# Altium PCB h743PCB.PcbDoc (part 2 of 3)
Units mil, origin at the board's own origin, x right, y up, seen from the top; angles counter-clockwise.
Board outline 2560 x 1770 mil, 4 copper layers (Top Layer, Signal, some, Bottom Layer), stack 63.712 mil thick; 101 components, 163 nets, 684 pads, 394 vias.
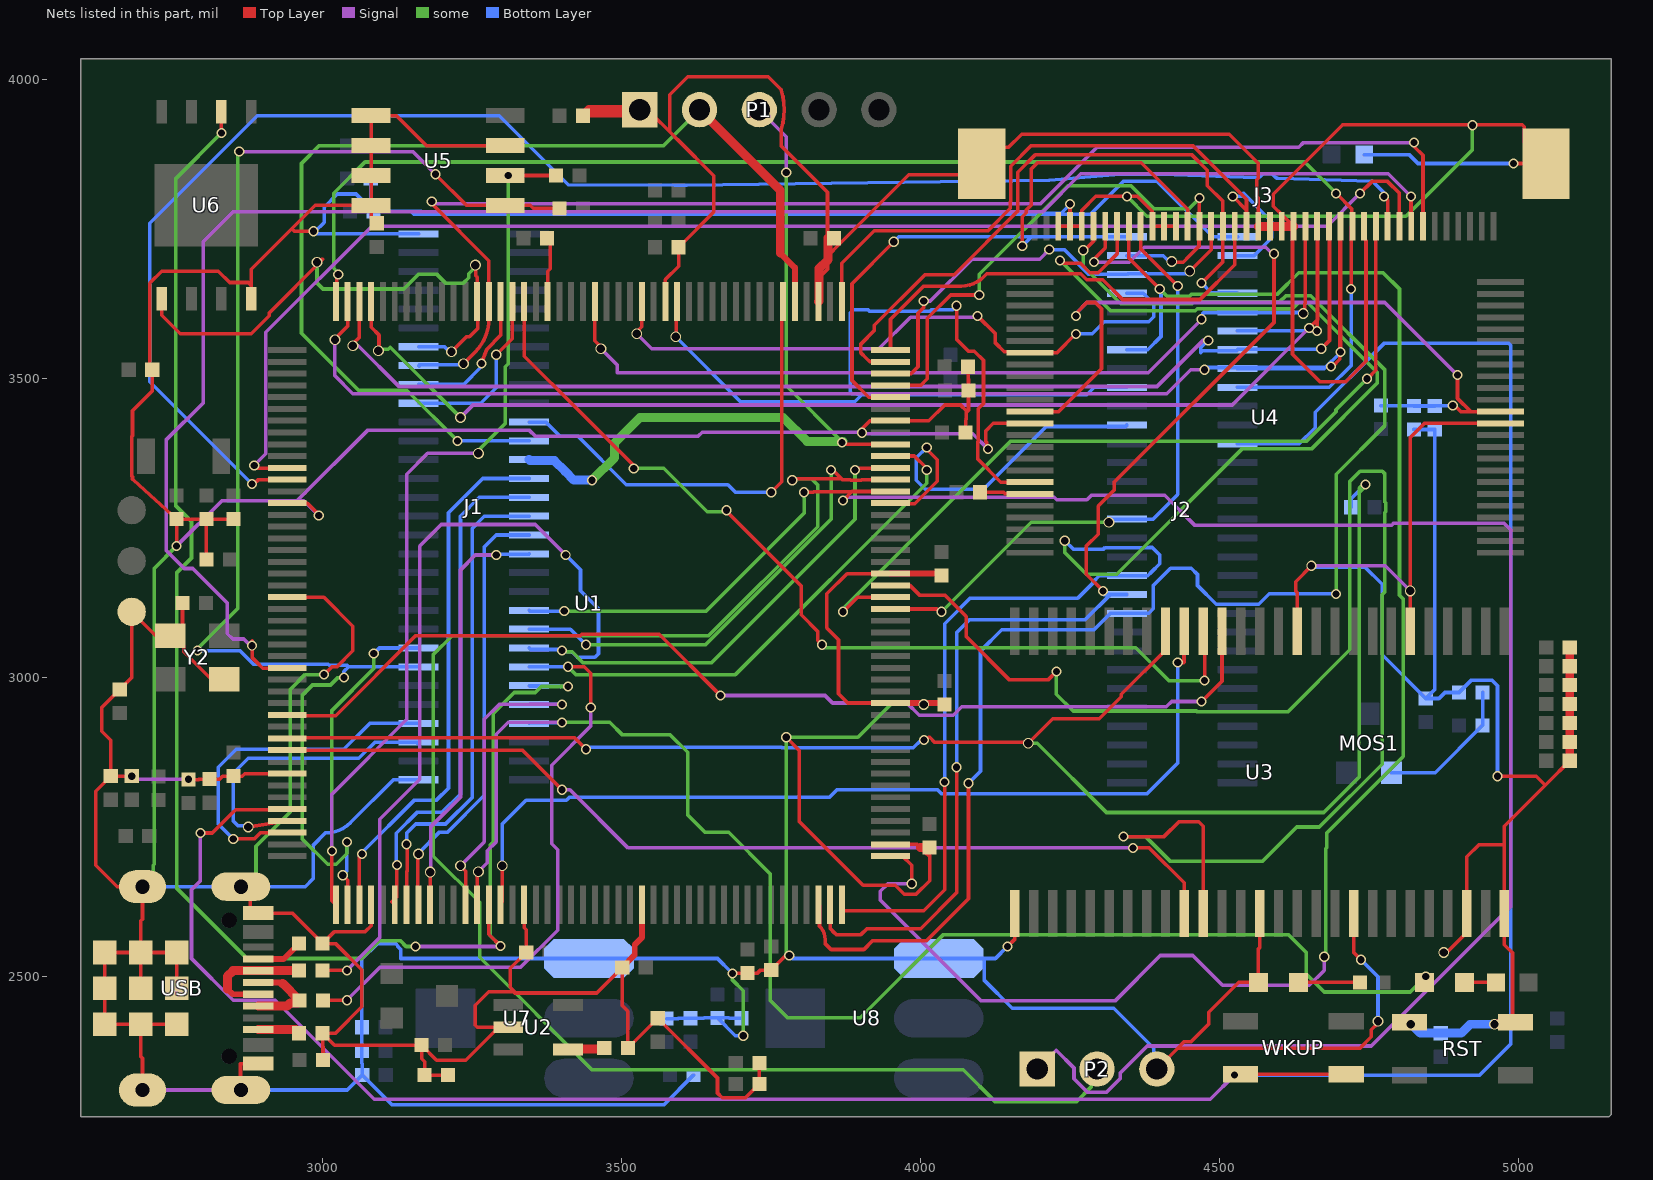
[diagram p4: the nets of this part, all layers, seen from the top]

## Via types
v1: diameter 17, hole 12, Top Layer to Bottom Layer, 305 vias
v2: diameter 18, hole 14, Top Layer to Bottom Layer, 72 vias
v3: diameter 17/16/16/16 (per signal layer), hole 12, Top Layer to Bottom Layer, 17 vias

## Nets (pads, with @x,y where several pads share a name; then routed paths per layer and width w, separated by ;. In a path a pad name is that pad's centre, name@x,y a point inside that pad or via, vN(x,y) a via of type N, cw(c..) or ccw(c..) an arc to the next point about the centre after c; other vN are vias at no path point) (continued)
FMC_NWAIT: J2.27 U1.150 U4.7 | length 1093.4
  Top Layer w6: v2(3525,3575) 3525,3578.25 3533.43,3586.67 U1.150@3533.43,3629.09 ; v1(4095,3605) 4125,3575 4125,3559.75 4139.75,3545 4181.02,3545 U4.7@4182.6,3543.42 4228,3543.42 v1(4259.58,3575)
  Signal w6: v2(3525,3575) 3550,3550 3930,3550 3983,3603 4093,3603 v1(4095,3605)
  Bottom Layer w6: v1(4259.58,3575) 4287,3575 4307,3595 4381.49,3595 4390,3603.51 4390,3625 4385,3630 4385,3630.51 J2.27@4372.56,3642.95 ; J2.27@4345,3642.95 J2.27@4372.56,3642.95 ; J2.27@4375.46,3640.05 J2.27@4372.56,3642.95
FMC_NWE: J2.22 U1.147 U4.18 | length 1595.9
  Top Layer w6: v2(3590,3570) 3591.24,3571.24 3591.24,3627.85 U1.147@3592.48,3629.09 ; v1(4060,3622) 4060,3566 4080,3546 4089.72,3546 4105,3530.72 4105,3458.03 4096.5,3449.53 4096.5,3395.15 4095.13,3393.78 4095.13,3365.83 4134.06,3326.89 U4.18@4182.6,3326.89
  Bottom Layer w6: v2(3590,3570) 3697.24,3462.76 3699,3461 3884.23,3461 cw(c3901.56,3386.89) 3890.31,3462.16 3901.14,3473 ; v1(4060,3622) 4053,3615 4017.57,3615 4015.07,3612.5 3914.5,3612.5 3912,3615 3887,3615 3882,3610 3882,3478 3885.24,3474.76 3885.52,3474.49 3901.14,3473 ; J2.22@4345,3485.47 4290.47,3485.47 4278,3473 3901.14,3473
FMC_SDCKE0: U1.35 U3.37 | length 1644.2
  Top Layer w6: U1.35@2940.3,2878.48 3333.8,2878.48 v1(3400,2812.29) ; v1(4355,2715) 4382.55,2715 4441.06,2656.49 U3.37@4441.06,2605
  Signal w6: v1(3400,2812.29) 3413.13,2812.29 3510.42,2715 v1(4355,2715)
FMC_SDCLK: U1.112 U3.38 | length 2601.3
  Top Layer w6: U1.112@3949.39,3154.08 3981.92,3154.08 3998,3138 4040,3138 4076,3102 4076,3068.54 4148.54,2996 4213,2996 v1(4227,3010) ; v1(4339,2734) 4407,2734 4432,2759 4465,2759 4472.56,2751.44 U3.38@4472.56,2605
  some w6: v1(4227,3010) 4227,2972 4255,2944 4461.25,2944 4462.75,2942.5 4614.22,2942.5 4718,3046.28 4718,3328 4735,3345 4772.49,3345 4776,3341.49 4776,3294.46 4778,3292.46 4778,3277.54 4776,3275.54 4776,3142.88 4772.02,3138.9 4772.02,2855.05 4666.97,2750 4629,2750 4572,2693 4417,2693 4376,2734 v1(4339,2734)
FMC_SDNCAS: U1.160 U3.17 | length 1581
  Top Layer w6: U1.160@3336.58,3629.09 3336.58,3537.71 3426.79,3447.5 3427.25,3447.5 3520,3354.75 v1(3520,3350) ; v1(3675,3280) 3675,3278.28 3800,3153.28 3800,3105 3827.9,3077.1 3827.9,3062.1 v1(3835,3055) ; U3.17@4472.56,3077.44 4475,3075 v1(4475,2995)
  some w6: v1(3520,3350) 3570.25,3350 3642.75,3277.5 3672.5,3277.5 v1(3675,3280) ; v1(3835,3055) 3840,3050 4360,3050 4415,2995 v1(4475,2995)
FMC_SDNE0: R19.2 U1.34 U3.19 | length 2776.2
  Top Layer w6: U1.34@2940.3,2898.17 2941.21,2899.09 3420.91,2899.09 v1(3440,2880) ; v1(4005.75,2895.5) 4008.73,2895.5 4013.12,2899.89 4015.11,2899.89 4023.5,2891.5 4178.5,2891.5 v2(4180,2890) 4221,2931 4298.63,2931 4335.66,2968.03 4335.66,2972.04 4409.57,3045.94 U3.19@4409.57,3077.44
  some w6: v2(4180,2890) 4195,2890 4310.82,2774.18 4674.18,2774.18 4734,2834 4734,3317 4740,3323 v1(4744,3323) 4744,3320.02 4734,3310.02
  Bottom Layer w6: v1(3440,2880) 3443.09,2883.09 3767.17,2883.09 3767.75,2882.5 3987.5,2882.5 4000.64,2895.64 4005.61,2895.64 v1(4005.75,2895.5) ; R19.2@4720,3285 4720,3299 v1(4744,3323)
FMC_SDNRAS: U1.59 U3.18 | length 1545.6
  Top Layer w6: U1.59@3297.21,2620 3296.1,2621.1 3300,2625 v2(3300,2685) ; v1(4430,3025) 4440.11,3025 4440.53,3025.42 4440.53,3076.91 U3.18@4441.06,3077.44
  Bottom Layer w6: v2(3300,2685) 3300,2755 3339.79,2794.79 3407.25,2794.79 3412.46,2800 3847.35,2800 3859.35,2812 4028.25,2812 4034.67,2805.58 4378.63,2805.58 4430,2856.96 v1(4430,3025)
FMC_SDNWE: U1.32 U3.16 | length 1783.9
  Top Layer w6: U1.32@2940.3,2937.54 2941.57,2936.27 3021.27,2936.27 3154.74,3069.74 3429.99,3069.74 3432.75,3072.5 3562.5,3072.5 v1(3665,2970) ; v1(4470,2960) 4504.05,2994.05 U3.16@4504.05,3077.44
  Signal w6: v1(3665,2970) 3840,2970 3852.5,2957.5 3977.04,2957.5 3997.54,2937 4054.57,2937 4068.57,2951 4410.75,2951 4419.75,2960 v1(4470,2960)
GND: C1.1 C2.1 C3.1 C4.1 C5.2 C6.2 C7.2 C8.1 C9.1 C10.1 C11.1 C12.2 C13.2 C14.2 C15.2 C16.2 C17.2 C18.2 C19.2 C20.2 C21.2 C22.2 C23.2 C24.2 C25.2 C26.2 C27.2 C28.1 C29.1 C30.1 C31.1 C32.1 C33.1 C35.1 C36.1 C37.1 C38.1 C39.1 C40.1 C41.1 C42.1 C43.1 C44.2 C45.2 C60.2 C61.2 C62.2 C63.2 C64.2 C65.2 C66.2 C68.2 C?34.2 GND.1 J1.1 J1.30 J2.31 J3.3 J3.4 J3.5 J3.11 J3.12 J3.13 J3.20 J3.21 J3.22 J3.23 J3.29 J3.A J3.B P1.1 P2.3 PWR.2 R1.1 R1.2 R4.2 R7.2 R14.1 R22.1 R23.1 RST.2 U1.14 U1.22 U1.37 U1.48 U1.61 U1.71 U1.90 U1.102 U1.113 U1.126 U1.135 U1.148 U1.158 U2.2 U3.6 U3.12 U3.28 U3.41 U3.46 U3.52 U3.54 U4.13 U4.36 U5.1 U5.2 U5.3 U5.4 U5.7 U6.4 U7.1 U8.1 USB.1 USB.12 USB.SH1 USB.SH2 USB.SH3 USB.SH4 Y2.2 Y2.4 | length 26524.6
  Top Layer w6: v3(2680,2835) C4.1@2645,2835 ; USB.SH2@2695,2480 USB.SH2@2695,2540 ; USB.SH4@2698.05,2309.92 2698.05,2363 2695,2366.05 USB.SH2@2695,2420 ; USB.SH2@2755,2420 USB.SH2@2695,2420 ; USB.SH2@2755,2480 USB.SH2@2755,2540 USB.SH2@2695,2540 ; v1(2755,3220) C8.1@2755,3265 ; C11.1@2765,3125 2765,3087.67 Y2.4@2747.33,3070 ; C7.2@2775,2829.37 2792,2829.37 2792.63,2830 C6.2@2810,2830 2827,2830 2832,2835 C13.2@2850,2835 2865,2835 2869.11,2839.11 U1.37@2940.3,2839.11 ; C26.2@2804.95,3197.52 2804.95,3231 2805,3231.05 C9.1@2805,3265 ; Y2.2@2835,2997.17 2813.09,2997.17 2766.95,3043.3 2766.95,3052.33 2749.28,3070 Y2.4@2747.33,3070 ; C18.2@2850,3265 C9.1@2805,3265 ; USB.SH3@2862.62,2309.92 2862,2309.92 2862,2354.02 USB.12@2891.95,2354.02 ; USB.SH1@2862.62,2650.08 2878,2650.08 2878,2605.98 USB.1@2891.95,2605.98 2948.39,2605.98 R22.1@2999.37,2555 ; U6.4@2880,3633.5 2880,3656 ; U1.22@2940.3,3134.39 3001.61,3134.39 3050,3086 3050,3044.74 3023,3017.74 3014.46,3017.74 v1(3001.72,3005) ; U1.14@2940.3,3291.87 2974,3291.87 2993,3272.87 v1(2993,3271) ; v1(2984.3,3746.7) 2952.3,3746.7 2948,3751 ; C33.1@3000,2360 3000,2382 2999.37,2382.63 R23.1@2999.37,2405 ; U1.48@3080.67,2620 3080.67,2585 3070.67,2575 3019.37,2575 R22.1@2999.37,2555 ; C27.2@3090,3760 3080.59,3769.41 U5.4@3080.59,3790 ; R1.2@3209.37,2335 R1.1@3170,2335 3170,2357 3165,2362 C1.1@3165,2385 ; U5.7@3305,3890 3173,3890 3123,3940 U5.1@3080.59,3940 U5.2@3080.59,3890 U5.3@3080.59,3840 U5.4@3080.59,3790 ; U2.2@3310,2415 U2.2@3294,2415 ; 3321,2472 3457.63,2472 3460.13,2474.5 ; U1.61@3336.58,2620 3336.58,2581.42 3340,2578 C19.2@3340,2540 3313.5,2513.5 3313.5,2482 3321,2474.5 ; U1.158@3375.95,3629.09 3375.95,3680 3380,3684.05 C22.2@3380,3735 ; C45.2@3435,3940 3553,3940 3580,3913 ; U1.148@3572.8,3629.09 3572.8,3665.8 3595,3688 C21.2@3595,3720 3654,3779 3654,3839 3654,3839.29 3593,3900.29 ; 3592.86,3900.14 3580,3913 ; v1@3683,2507 v1@3684.37,2505.63 ; v1(3685,2505) v1@3684.37,2505.63 ; C32.1@3730,2355 C31.1@3730,2320 3707,2297 3668,2297 3660,2305 3660,2330 C29.1@3560,2430 C30.1@3510,2380 3510,2442 3500.63,2451.37 C15.2@3500.63,2515 3460.13,2474.5 ; v1(3775,2900) 3797,2878 3797,2759.06 3903.56,2652.5 3957.25,2652.5 3972.25,2637.5 3992.25,2637.5 4015,2660.25 4015,2700 ; v1(3780,2535) 3774.37,2535 C14.2@3750,2510.63 3732,2510.63 3727,2505.63 C3.1@3710,2505.63 v1@3684.37,2505.63 ; 3829.79,3668.94 3844,3683.14 3844,3705 3864.5,3725.5 3980,3841 4102.09,3841 J3.A@4102.09,3859.43 4129.61,3886.94 4146.94,3886.94 4169,3909 4516,3909 4564.69,3860.31 4564.69,3835.14 4562,3832.46 4562,3805.38 4564.69,3802.7 J3.20@4564.69,3755 ; C23.2@3844,3735 3844,3812 3767,3889 3767,3917 ccw(c3653.33,3950) 3767,3983 3765.92,3984.08 3745,4005 3610,4005 3580,3975 3580,3913 ; C23.2@3845,3735 C23.2@3855,3735 ; v1(3902,3409.5) 3902,3416.67 3915,3429.67 4010.8,3429.67 ; U1.90@3949.39,2721 3994,2721 3999.37,2715.63 4007.19,2707.82 4015,2700 ; U1.102@3949.39,2957.22 3949.11,2957.5 3877.75,2957.5 3862.5,2972.75 3862.5,3063.5 3843,3083 3843,3140 3876.76,3173.76 U1.113@3949.39,3173.76 ; U1.126@3949.39,3429.67 4010.8,3429.67 ; C20.2@4015,2715.63 4015,2700 ; C5.2@4075,3410 4075,3430.81 4076,3431.81 4076,3443 ; C17.2@4079.37,3520 4079.37,3499.63 4080,3499 C16.2@4080,3480 4080,3447 4077.81,3444.81 4076,3443 ; v1(4112.63,3382.5) 4110.52,3384.6 4110.52,3393.73 4108.5,3395.75 4108.5,3412.25 4121.57,3425.31 U4.13@4182.6,3425.31 ; v1(4145,2550) 4157.6,2562.6 U3.28@4157.6,2605 ; J3.3@4230.04,3755 J3.4@4249.73,3755 ; v1(4250,3792) 4249.73,3791.73 J3.4@4249.73,3755 ; P2.3@4395,2345 4430,2380 ; J3.13@4426.89,3755 J3.12@4407.21,3755 J3.11@4387.52,3755 4387.52,3780 4381.52,3786 4362.52,3805 v1(4345,3805) 4293,3805 4269.41,3781.41 4269.41,3780 J3.5@4269.41,3755 J3.4@4249.73,3755 ; U3.41@4567.05,2605 4567.05,2548.05 4565,2546 PWR.2@4565,2490 4532,2490 4482,2440 4482,2420.28 4452.22,2390.5 4440.5,2390.5 4430,2380 ; U3.12@4630.04,3077.44 4630.04,3142.21 4627.5,3144.75 4627.5,3160.5 4653.5,3186.5 v1(4653.5,3186.96) ; U3.46@4724.53,2605 4724.53,2557.47 4724.53,2540 v3(4736.53,2528) ; J3.29@4741.85,3755 4743.77,3753.08 4743.77,3732.09 4745,3730.86 4745,3529 4711,3495 4668,3495 4622,3541 4622,3753.26 J3.23@4623.74,3755 4604.55,3774.19 4590,3788.74 4590,3808.74 4705.26,3924 4705.76,3924.5 4922.5,3924.5 v1(4923,3924) ; v2(4765,2425) 4765,2421.75 4754,2410.75 4754,2410 4754,2399 4735,2380 4430,2380 ; U3.6@4819.02,3077.44 v2@4819.02,3140 ; v2(4819.02,3145) v2@4819.02,3140 ; 4819.02,3236.01 v2@4819.02,3140 ; 4819,3236.03 4819,3332.04 4819.02,3401.63 4842.7,3425.31 U4.36@4970,3425.31 ; v2(4875,2540) 4877.3,2542.3 4882.3,2542.3 4913.5,2573.5 U3.52@4913.5,2605 4913.5,2700 4934.01,2720.5 4975.99,2720.5 4976.5,2720 ; v1@4922.5,3925 5006.08,3925 5009.6,3921.49 5009.6,3895.8 J3.B@5045.97,3859.43 ; v1(4965,2835) 5030,2835 5045.01,2819.99 ; v1(4992,3860) J3.B@5045.97,3860 ; RST.2@4995,2423.58 4990,2428.58 4990,2539.5 4976.5,2553 U3.54@4976.5,2605 4976.5,2720 ; C39.1@5085.83,2860.81 5068.79,2843.76 5066.51,2841.49 4976.5,2751.47 4976.5,2720 ; C4.1@2645,2835 2620,2810 2620,2686 2655.92,2650.08 USB.SH2@2698.05,2650.08 2698.05,2596.05 2695,2593 USB.SH2@2695,2540 ; C4.1@2645,2835 2645,2895 2630,2910 2630,2950 C10.1@2660,2980 2680,3000 GND.1@2680,3110 2720,3070 Y2.4@2744.45,3070 Y2.4@2747.33,3070 ; USB.SH2@2695,2420 USB.SH2@2635,2420 USB.SH2@2635,2480 USB.SH2@2635,2540 USB.SH2@2695,2540 ; C8.1@2755,3265 2683.28,3330.21 2681.32,3332.18 2681.32,3334.65 2681.32,3335.68 2680.25,3336.74 2680.25,3403.26 2681.32,3404.32 2681.32,3446.32 2714.37,3479.37 C44.2@2714.37,3515 2710,3519.37 2710,3659.86 2710,3660 2730,3680 2824.78,3680 2843.78,3661 2875,3661 2880,3656 ; C8.1@2755,3265 C9.1@2805,3265 ; 2880,3656 2880,3683 2948,3751 ; 2948,3751 2987,3790 U5.4@3080.59,3790 ; R23.1@2999.37,2405 3019.37,2385 C1.1@3165,2385 ; R23.1@2999.37,2405 3021,2405 3065,2449 3065,2511 3021,2555 R22.1@2999.37,2555 ; C1.1@3165,2385 3190,2360 3239,2360 U2.2@3294,2415 ; U2.2@3294,2415 3258.51,2415 3255,2418.51 3255,2452 3277.5,2474.5 3321,2474.5 ; 3321,2474.5 3323,2472.5 3458.13,2472.5 3460.13,2474.5 ; 4010.8,3429.67 4013.63,3429.67 4039.96,3456 4066.63,3456 4076,3446.63 4076,3443
  Top Layer w10: C15.2@3500.63,2515 3521.58,2535.95 3521.58,2553.16 3533.43,2565 U1.71@3533.43,2620 ; U1.102@3949.39,2957.22 4037.78,2957.22 C25.2@4038.89,2956.11 ; U1.113@3949.39,3173.76 4031.87,3173.76 C24.2@4035,3170.63
  Top Layer w15: C45.2@3435,3940 3445,3950 P1.1@3530,3950 ; U1.135@3828.7,3629.09 3829.79,3630.19 3829.79,3667.85 3829.79,3684.07 3845,3699.28 C23.2@3845,3735 ; 3999.37,2715.63 C20.2@4015,2715.63 ; J3.20@4564.69,3755 J3.21@4584.37,3755 J3.22@4604.06,3755 J3.23@4623.74,3755 ; v2(4960,2420) 4960.57,2420.57 4991.99,2420.57 RST.2@4995,2423.58 ; C39.1@5085.83,2860.81 C38.1@5085.83,2892.43 C37.1@5085.83,2924.06 C40.1@5085.83,2955.68 C43.1@5085.83,2987.3 C42.1@5085.83,3018.92 C41.1@5085.83,3050.54
  Signal w6: v3(2680,2835) 2682.71,2835 2687.71,2830 v3(2775,2830) ; USB.SH4@2698.05,2309.92 USB.SH3@2862.62,2309.92 ; v1(2755,3220) 2831,3296 2959,3296 ; v1(2993,3271) 2968,3296 2959,3296 ; v1(3902,3409.5) 3901,3410.5 3634.56,3410.5 3628.06,3404 3354.97,3404 3345.53,3413.44 3074.4,3413.44 2959,3298.04 2959,3296 ; v1@3906,3408 4087,3408 4112.5,3382.5 v1(4112.63,3382.5) ; v1(4653.5,3186.96) 4777.06,3186.96 v2(4819.02,3145)
  some w6: USB.SH2@2698.05,2650.08 2716,2650.08 2716,2686.25 2717.5,2687.75 2717.5,3182.5 v1(2755,3220) ; USB.SH1@2862.62,2650.08 2888,2650.08 2888,2718 2945,2775 2945,2980 2970,3005 v1(3001.72,3005) ; v1(3685,2505) 3685,2494 3703,2476 v1(3703,2400.8) ; v1(3780,2535) 3775,2540 v1(3775,2900) 3895,2900 3950,2955 v2(4005,2955) ; v1(4345,3805) 4378,3772 4811.75,3772 4923,3883.25 v1(4923,3924)
  Bottom Layer w6: USB.SH2@2698.05,2650.08 USB.SH1@2862.62,2650.08 2970.08,2650.08 2984,2664 2984,2720 3004,2740 ccw(c3004,2800.32) 3046.68,2757.7 3118,2829.02 J1.1@3160,2829.02 ; USB.SH3@2862.62,2309.92 3040.55,2309.92 C61.2@3065.63,2335 ; R4.2@3080,3835 R7.2@3080,3784.37 ; J1.30@3160,3742.4 2988.6,3742.4 2986.45,3744.55 2986.45,3745.88 3002,3761.43 3002,3787 3024,3809 3055.37,3809 R7.2@3080,3784.37 ; C63.2@3575,2429.37 3594,2429.37 3594.63,2430 C62.2@3615,2430 3637,2430 3637.63,2430.63 C68.2@3660,2430.63 ; C60.2@3620,2335 3570,2285 3115.63,2285 C61.2@3065.63,2335 ; v1@3683,2507 3660,2530 U7.1@3445,2530 3130,2530 3130,2545 3125,2550 3125,2551.49 3121.49,2555 3091.5,2555 3065,2528.5 C64.2@3065,2415 C65.2@3065,2375 3065,2354.63 3065.63,2354 C61.2@3065.63,2335 ; C66.2@3700,2430 3679.63,2430 3679,2430.63 C68.2@3660,2430.63 ; v1(3703,2400.8) 3689.83,2400.8 C68.2@3660,2430.63 ; v1(3780,2535) 3785,2530 U8.1@4030,2530 4106,2530 ; v1(4145,2550) 4125,2530 4106,2530 ; v1(4250,3792) 4235,3777 3167,3777 3164,3780 3147,3780 ; P2.3@4395,2345 4389.99,2350.01 4389.99,2380.01 4323,2447 4153,2447 4106,2494 4106,2530 ; J2.31@4530.04,3737.44 4488.56,3737.44 4396,3830 4339,3830 4284,3775 4235,3775 3167,3775 3152,3775 3147,3780 ; v1(4653.5,3186.96) 4655.46,3185 4743,3185 4772,3156 4772,3038 C?34.2@4845,2965 ; v3(4736.53,2528) 4765,2499.53 v2(4765,2425) ; C28.1@4742,3875 4817,3875 4832,3860 v1(4992,3860) ; C36.1@4825,3415 C35.1@4860,3415 4860,2980 C?34.2@4845,2965 ; v1(4965,2835) 4965,2986.35 4955.54,2995.81 4921.44,2995.81 R14.1@4900.63,2975 4877,2975 4867,2965 C?34.2@4845,2965 ; R7.2@3080,3784.37 R7.2@3084.37,3780 3147,3780
  Bottom Layer w15: v2(4820,2420) 4820.81,2420 4835.81,2405 4836.42,2405 C12.2@4870,2405 4904.31,2405 4919.31,2420 v2(4960,2420)
IIC_SCL: J1.8 R20.1 U1.45 U5.6 | length 1917.7
  Top Layer w6: v1(3015,2710) 3015,2626.61 U1.45@3021.61,2620 ; U5.6@3305,3840 R20.1@3390,3840
  Signal w6: v1(3015,2710) 3015,2805 3140,2930 3140,3340 3175,3375 v2(3260,3375)
  some w6: v1(3015,2710) 3015,2945 3085,3015 v3(3085,3040) ; v2(3260,3375) 3259.99,3379.99 3305,3425 3305,3520 3310,3525 v3(3310,3840)
  Bottom Layer w6: v3(3085,3040) 3094.49,3049.49 J1.8@3160,3049.49
IIC_SDA: J1.7 R21.1 U1.46 U5.5 | length 2394.8
  Top Layer w6: v1(3033,2669.3) 3041.3,2661 U1.46@3041.3,2620 ; v1(3188,3842) 3240,3790 U5.5@3305,3790 3347,3790 3352,3785 R21.1@3395.63,3785
  Signal w6: v1(2860,3880) 3150,3880 v1(3188,3842)
  some w6: v1(2790,3045) 2790,3048 2857.5,3115.5 2857.5,3877.5 v1(2860,3880) ; v1(3035,3000) 3025,3000 3012.5,2987.5 2982.5,2987.5 2965,2970 2965,2730.25 3007.75,2687.5 3022.25,2687.5 3040,2705.25 v1(3040,2725)
  Bottom Layer w6: v1(2790,3045) 2861.17,3045 2883.67,3022.5 3008.97,3022.5 3010.91,3020.56 3040.43,3020.56 3043,3017.99 ; v1(3033,2669.3) 3040,2676.3 v1(3040,2725) ; v1(3035,3000) 3035,3009.99 3043,3017.99 ; J1.7@3160,3017.99 3043,3017.99
JTCK: J1.42 P1.2 U1.137 | length 1829.8
  Top Layer w10: 3765,3710 3789.33,3685.67 U1.137@3789.33,3629.09
  Top Layer w15: P1.2@3630,3950 3765,3815 3765,3710
  some w6: v1(3225.06,3395.94) 3140.29,3480.71 3135.98,3480.71 3059.29,3480.71 2964,3576 2964,3651 2964,3860 2994,3890 3570,3890 P1.2@3630,3950
  Bottom Layer w6: v1(3225.06,3395.94) J1.42@3345.04,3395.94
JTMS: J1.43 P1.3 U1.124 | length 1308.1
  Top Layer w6: v1(3868.5,3393) 3871.2,3390.3 U1.124@3949.39,3390.3
  Signal w6: P1.3@3730,3950 3775,3905 v1(3775,3845)
  some w6: v1(3775,3845) 3775,3488 v1@3868,3395
  some w15: v1(3450,3330) 3487.79,3367.79 3487.79,3392.79 3530,3435 3770,3435 3810,3395 v1@3870,3395
  Bottom Layer w15: J1.43@3345.04,3364.45 3346.63,3362.85 3387.15,3362.85 3405,3345 3419.62,3330.38 3449.62,3330.38 v1(3450,3330)
LCD_B3: J2.35 J3.24 U1.154 | length 1476.6
  Top Layer w6: U1.154@3454.69,3629.09 3454.69,3563.56 3465,3553.25 v2(3465,3550) ; v2(4640,3609) 4640,3610 4642.3,3612.3 4642.3,3625.54 4643.43,3626.67 J3.24@4643.43,3755
  Signal w6: v2(3465,3550) 3492.63,3522.37 3492.63,3510 4380.5,3510 v1(4470,3599.5)
  Bottom Layer w6: v1(4470,3599.5) 4472.1,3601.6 4472.1,3609.32 4473.51,3610.73 4529.31,3610.73 4638.27,3610.73 v2(4640,3609)
LCD_B4: J2.36 J3.25 U1.173 | length 2243.1
  Top Layer w6: U1.173@3080.67,3629.09 3080.67,3586.1 3093.77,3573 3093.77,3547.93 v2(3092.69,3546.85) ; v1(4650,3585) 4664.06,3599.06 4664.06,3754.06 J3.25@4663.11,3755 v1(4663.11,3579.96)
  Signal w6: v2(3230,3435) 3251,3456 4521,3456 v1(4650,3585)
  some w6: v2(3092.69,3546.85) 3094.99,3549.15 3108.74,3549.15 3112.3,3552.7 v2(3230,3435)
  Bottom Layer w6: J2.36@4530.04,3579.96 4641.98,3579.96 v1(4663.11,3579.96)
LCD_B5: J2.37 J3.26 U1.174 | length 2011.3
  Top Layer w6: v2(3050,3555) 3050,3558.25 3060.99,3569.23 U1.174@3060.99,3629.09 ; v1@4669.23,3549.23 4683.9,3563.9 4683.9,3753.9 J3.26@4682.8,3755
  Signal w6: v2(3050,3555) 3059.09,3555 3127.09,3487 4395.28,3487 4472.28,3564 v1(4481,3564)
  Bottom Layer w6: v1(4481,3564) 4468.72,3551.72 4468.72,3543.72 4471.73,3546.73 4528.31,3546.73 J2.37@4530.04,3548.46 4530.81,3549.23 4669.23,3549.23 v1(4670,3550)
LCD_B6: J2.38 J3.27 U1.175 | length 2459.1
  Top Layer w6: v2(3020,3565) 3020,3566.75 3041.3,3588.05 U1.175@3041.3,3629.09 U1.175@3040.65,3628.44 ; v1(4686.52,3520.5) 4689.4,3520.5 4701.24,3532.34 4701.24,3753.76 J3.27@4702.48,3755 v1(4702.48,3544.45)
  Signal w6: v2(3020,3565) 3020,3505 3050,3475 3080.25,3475 4411.57,3475 4451.57,3515 v1(4475,3515)
  Bottom Layer w6: v1(4475,3515) 4478.73,3518.73 4675,3518.73 ; J2.38@4530.04,3516.97 4675,3516.97 v1(4702.48,3544.45) ; v1@4684.75,3518.73 v1(4686.52,3520.5)
LCD_B7: J2.39 J3.28 U1.176 | length 2411.7
  Top Layer w6: U1.176@3021.61,3629.09 3023.31,3630.79 3023.31,3672.27 v3(3025.52,3674.48) ; v1(4695,3810) 4721.08,3783.92 4721.08,3756.08 J3.28@4722.17,3755 4720,3752.83 v1(4720,3650)
  some w6: v3(3025.52,3674.48) 3025,3675 3025,3677.71 3017.89,3684.81 3017.89,3687.11 3017.89,3810 3070.39,3862.5 4642.5,3862.5 v1(4695,3810)
  Bottom Layer w6: J2.39@4530.04,3485.47 4683.72,3485.47 4720,3521.75 v1(4720,3650)
LCD_BL: J1.23 J3.34 U1.163 | length 2235.9
  Top Layer w6: v1(3182,3796.5) 3182,3793 3277.52,3697.48 U1.163@3277.52,3629.09 3277.52,3600.27 cw(c3198.56,3600.23) 3254.37,3544.37 v2(3235,3525) ; v1(4825,3895) 4825,3889 4840.28,3873.72 J3.34@4840.28,3755
  Signal w6: v1(3182,3796.5) 3185.5,3793 4201.03,3793 4295.03,3887 4632.46,3887 4640.46,3895 v1(4825,3895)
  Bottom Layer w6: J1.23@3160.96,3520.96 J1.23@3160,3521.93 3161.54,3523.47 3233.47,3523.47 v2(3235,3525)
LCD_CLK: J3.30 U1.111 | length 1394.4
  Top Layer w6: v1(3870,3110) 3894.39,3134.39 U1.111@3949.39,3134.39 ; v1(4746.5,3500) 4748.88,3502.38 4750,3502.38 4761.54,3513.92 J3.30@4761.54,3755
  some w6: v1(3870,3110) 3870,3112.98 3873.87,3116.85 3873.87,3118.87 4150,3395 4645,3395 4694.7,3444.7 4694.7,3448.2 v1(4746.5,3500)
LCD_DE: J3.33 U1.28 | length 3010.4
  Top Layer w6: v1@2881.32,3061.45 v1(2881.32,3053.35) 2882,3052.67 2882,3032.85 2889.61,3025.25 2899.21,3015.64 2939.66,3015.64 U1.28@2940.3,3016.28 ; v1(4820,3805) 4820.3,3804.7 4820.3,3755.3 J3.33@4820.59,3755
  Signal w6: v1(2881.32,3053.35) 2878.83,3053.35 2867.7,3064.49 2848.9,3064.49 2839.87,3073.51 2839.87,3124.87 2782.25,3182.5 2767.75,3182.5 2737.5,3212.75 2737.5,3397.5 2800,3460 2800,3730 2849,3779 4204,3779 4268,3843 4782,3843 v1(4820,3805)
LCD_G2: J2.30 J3.14 U1.128 | length 1213.8
  Top Layer w6: U1.128@3949.39,3469.04 3912.96,3469.04 3885,3497 3885,3659 v1(3955,3729) ; v1(4170,3722) 4170,3771.06 4176.75,3777.81 4176.75,3782.35 4185,3790.6 4185,3850.86 4195.28,3861.13 4368.87,3861.13 4446.58,3783.42 J3.14@4446.58,3755
  Bottom Layer w6: v1(3955,3729) 3963.44,3737.44 4185.44,3737.44 ; v1(4170,3722) 4185.44,3737.44 ; J2.30@4345,3737.44 4185.44,3737.44
LCD_G3: J2.29 J3.15 U1.129 | length 976.1
  Top Layer w6: U1.129@3949.39,3488.72 4000,3488.72 4011,3499.72 4011,3601 4050,3640 v1(4098,3640) ; v2(4420,3696) 4421,3695 4439.05,3695 4449.28,3705.24 4465.63,3721.58 4465.63,3754.37 J3.15@4466.26,3755 v1(4466.26,3802.5)
  some w6: v1(4098,3640) 4098,3674.75 4245.75,3822.5 4352.25,3822.5 4390.75,3784 4448.26,3784 4466.26,3802 v1(4466.26,3802.5)
  Bottom Layer w6: J2.29@4345,3705.94 4405.81,3705.94 4415.75,3696 v2(4420,3696)
LCD_G4: J2.28 J3.16 U1.130 | length 754.8
  Top Layer w6: U1.130@3949.39,3508.41 3983.81,3508.41 3995.41,3520 3995.41,3609.41 4005,3619 v1(4005,3630) ; v2(4450,3680) 4485.95,3715.95 J3.16@4485.95,3755
  Signal w6: v1(4005,3630) 4016,3630 4086,3700 4199,3700 v1(4215,3716)
  Bottom Layer w6: v1(4215,3716) 4240,3716 4281.55,3674.45 J2.28@4345,3674.45 4346.05,3675.5 4445.5,3675.5 v2(4450,3680)
LCD_G5: J2.34 J3.17 U1.131 | length 1116.7
  Top Layer w6: U1.131@3949.39,3528.09 3915,3528.09 3909,3534.09 3900,3543.09 3900,3558 3922.5,3580.5 3922.5,3589.47 4007.03,3674 4055.97,3674 4162.46,3780.49 4162.46,3845.28 4192.17,3875 4453.03,3875 4479.33,3848.7 4479.33,3822.92 4505.63,3796.62 J3.17@4505.63,3755 4505.63,3695.63 v1(4470,3660)
  Bottom Layer w6: v1(4470,3660) 4486.02,3643.98 4529.02,3643.98 J2.34@4530.04,3642.95
LCD_G6: J3.18 U1.132 | length 763
  Top Layer w6: U1.132@3949.39,3547.78 3949.39,3599.39 4005,3655 4067.88,3655 ; 4067.93,3655 ccw(c4067.93,3708.28) 4105.64,3670.64 4110.46,3675.46 4267.83,3675.46 4277.78,3665.5 4304.5,3665.5 4337.5,3632.5 4467.25,3632.5 4525.32,3690.57 J3.18@4525.32,3755
LCD_G7: J2.32 J3.19 U1.133 | length 1178.2
  Top Layer w6: U1.133@3868.07,3629.09 3868.07,3693.07 3922.5,3747.5 4112.5,3747.5 4150,3785 4150,3796.19 4150.46,3796.64 4150.46,3855.46 4185,3890 4455,3890 4545,3800 4545,3782 ; v1(4522,3805) 4545,3782 ; J3.19@4545,3755 4545,3782
  Bottom Layer w6: v1(4522,3805) 4540,3805 4545,3800 4540,3810 4587.51,3762.49 4587.51,3735.86 4557.6,3705.94 J2.32@4530.04,3705.94
LCD_HSYNC: J3.31 U1.12 | length 2830.4
  Top Layer w6: v3(2881.44,3323.56) 2884.42,3323.56 2892.1,3331.24 U1.12@2940.3,3331.24 U1.12@2940.92,3330.62 ; v1(4775,3805) 4781.14,3798.86 4781.14,3755.08 J3.31@4781.22,3755
  Bottom Layer w6: v3(2881.44,3323.56) 2710,3495 2710,3760 2890,3940 3295,3940 3408.74,3826.26 3410.5,3824.5 3588.17,3823.5 3608.17,3823.5 4214.97,3832 4334.03,3842 4400.97,3842 4563.37,3836.52 ; 4563.4,3836.51 ccw(c4563.57,3842.51) 4567.81,3838.27 4572.54,3843 4587.46,3843 4593.33,3837.12 ccw(c4597.55,3841.39) 4595.23,3835.86 ccw(c4597.61,3841.36) 4597.37,3835.37 4756.32,3830 4775,3811.32 v1(4775,3805)
LCD_R3: J2.10 J3.6 U1.86 | length 2559.7
  Top Layer w6: U1.86@3828.7,2620 3830.7,2618 3830.7,2586.66 3830.7,2584.3 cw(c3808.25,2561.85) 3840,2561.85 3840,2555 3850,2545 3905,2545 3920,2560 4010,2560 4080,2630 v1(4080,2823.08) ; v1(4272,3715) 4274.1,3715 4289.1,3730 J3.6@4289.1,3755
  some w6: v1(4272,3715) 4272,3688.25 4334.75,3625.5 4454.28,3625.5 4457.78,3629 4600.97,3629 4610.97,3639 4652.43,3639 4776,3515.43 4776,3421 4695,3340 v1(4695,3140)
  Bottom Layer w6: v1(4080,2823.08) 4100,2843.08 4100,3044.54 4135.46,3080 4289.92,3080 4317.44,3107.52 J2.10@4345,3107.52 4381.52,3107.52 4389,3115 4389,3154 4418,3183 4452.46,3183 4463,3172.46 4463,3153.96 4494.53,3122.43 4565.55,3122.43 4583.12,3140 v1(4695,3140)
LCD_R4: J2.11 J3.7 U1.87 | length 2145.5
  Top Layer w6: U1.87@3848.39,2620 3848.39,2592.52 3848.39,2580.13 3855,2573.51 3858.51,2570 3900,2570 3910,2580 4000,2580 4060,2640 v1(4060,2850) ; v1(4290,3695) 4290,3700 4308.78,3718.78 J3.7@4308.78,3755 ; v1(4305,3145) 4277,3173 4277,3220.03 4296.88,3239.91 4296.88,3286.88 4323.5,3313.5 4323.5,3326.5 4591,3594 v1(4591,3709)
  Signal w6: v1(4290,3695) 4348.8,3695 4373.8,3720 4577.02,3720 4588.02,3709 v1(4591,3709)
  Bottom Layer w6: v1(4060,2850) 4060,3075 4082,3097 4275.42,3097 J2.11@4317.44,3139.02 ; v1(4305,3145) 4300,3145 4305.98,3139.02 J2.11@4317.44,3139.02 ; J2.11@4345,3139.02 J2.11@4317.44,3139.02
LCD_R5: J2.12 J3.8 U1.88 | length 2719.4
  Top Layer w6: U1.88@3868.07,2620 3868.07,2612 3870.07,2610 4005,2610 4040,2645 v1(4040,2825) ; v1(4233,3698) 4238,3693 4267.25,3693 4282.75,3677.5 4297.25,3677.5 4328.47,3708.72 J3.8@4328.47,3755
  some w6: v1(4233,3698) 4317.5,3613.5 4459.25,3613.5 4462.75,3617 4622.54,3617 4632.54,3627 4647.46,3627 4764,3510.46 4764,3492.75 4653.75,3382.5 4537.5,3382.5 4328,3173 4277.25,3173 4241,3209.25 v1(4241,3229)
  Bottom Layer w6: v1(4040,2825) 4040,3001 4040,3090 4047.5,3097.5 4083,3133 4263,3133 4266.35,3136.35 4288.25,3158.25 4288.25,3160 4298.76,3170.51 J2.12@4345,3170.51 4380,3170.51 4386,3176.51 4400,3190.51 4400,3205 4387.49,3217.51 4382.51,3217.51 4308.39,3217.5 4305.89,3215 4255,3215 v1(4241,3229)
LCD_R6: J2.24 J3.9 U1.89 | length 2924.3
  Top Layer w6: U1.89@3949.39,2701.32 3969.5,2701.32 3985,2685.82 v1(3985,2655) ; J3.9@4348.15,3755 4348.15,3701.85 v1(4400,3650)
  Signal w6: v1(3985,2655) 3945.25,2655 3932.5,2642.25 3932.5,2627.75 4101.25,2459 4325,2459 4401,2535 4455,2535 4505,2485 4650,2485 4675,2510 v1(4675,2533)
  some w6: v1(4400,3650) 4412.5,3637.5 4449.31,3637.5 4452.81,3641 4596,3641 4632.5,3677.5 4773.5,3677.5 4801.02,3649.98 4801.02,3137.54 4807.02,3131.54 4807.02,2868.05 4679.04,2740.07 4679.04,2715.29 4677.28,2713.54 4677.28,2535.28 v1(4675,2533)
  Bottom Layer w6: J2.24@4345,3548.46 4380,3548.46 4402,3570.46 4402,3648 v1(4400,3650)
LCD_R7: J2.15 J3.10 U1.110 | length 1038.3
  Top Layer w6: U1.110@3949.39,3114.71 4027.05,3114.71 4031.75,3110 v1(4035,3110) ; J3.10@4367.84,3755 4367.84,3717.16 v1(4430,3655)
  some w6: v1(4035,3110) 4185,3260 v2(4314.88,3260)
  Bottom Layer w6: v2(4314.88,3260) 4319.88,3265 4388.61,3265 4430,3306.39 v1(4430,3655)
LCD_VSYNC: J3.32 U1.11 | length 2352.3
  Top Layer w6: v1(2885,3355) 2889.54,3350.46 2939.83,3350.46 U1.11@2940.3,3350.93 ; v1(4735,3810) 4755,3830 4781.07,3830 4800.91,3810.16 J3.32@4800.91,3755
  Signal w6: v1(2885,3355) 2904.5,3374.5 2904.5,3577.5 3082,3755 4680,3755 v1(4735,3810)
LED0: DS0.2 J1.57 U1.57 | length 2447.5
  Top Layer w6: U1.57@3257.84,2620 3257.84,2672.84 v2(3260,2675) ; DS0.2@4843.07,2490 4843.07,2498.07 v3(4845,2500)
  Signal w6: v2(3260,2675) 3275,2690 3275,2710 3290,2725 3290,2905 3310,2925 v1(3400,2925)
  some w6: v1(3400,2925) 3480,2925 3501,2904 3581,2904 3610,2875 3610,2770 3639,2741 3679,2741 3748,2672 3748,2460 3777,2431 3899,2431 4038,2570 4480,2570 4615,2570 4645,2540 4645,2504 4675,2474 4819,2474 v3(4845,2500)
  Bottom Layer w6: J1.57@3345.04,2923.5 3345.79,2924.25 3399.25,2924.25 v1(3400,2925)
NetC30_2: C30.2 U2.4 | length 61.6
  Top Layer w15: U2.4@3410,2377.6 3411.2,2378.8 3469.43,2378.8 C30.2@3470.63,2380
NetC35_2: C35.2 C36.2 R16.1 U4.12 U4.37 | length 1334.4
  Top Layer w6: U4.12@4182.6,3445 4231.13,3445 4302.5,3516.37 4302.5,3617.25 4292.25,3627.5 4277.75,3627.5 4260,3609.75 v1(4260,3605) ; v1(4890,3455) 4893.25,3455 4903.25,3445 U4.37@4970,3445 4920,3445 4898,3467 v1(4898,3506)
  Signal w6: v1(4260,3605) 4260,3609.75 4277.75,3627.5 4776.5,3627.5 v1(4898,3506)
  Bottom Layer w6: R16.1@4770,3455 4824.37,3455 C36.2@4825,3454.37 C35.2@4860,3454.37 4860.63,3455 v1(4890,3455)
NetDS0_1: DS0.1 R10.2 | length 52.5
  Top Layer w6: DS0.1@4910,2490 4936,2490 4936.06,2490.06 R10.2@4962.5,2490.06
NetMOS1_1: MOS1.1 R13.2 R14.2 | length 240.4
  Bottom Layer w6: MOS1.1@4787.4,2840.79 4860.79,2840.79 R13.2@4940,2920 R14.2@4940,2975
NetPWR_1: PWR.1 R15.1 | length 103.1
  Top Layer w6: PWR.1@4631.93,2490 R15.1@4735,2490
NetR11_2: R11.2 USB.6 USB.8 | length 153.7
  Top Layer w10: USB.6@2891.95,2489.84 2930.79,2489.84 2932.38,2488.25
  Top Layer w15: USB.8@2891.95,2450.47 2940.04,2450.47 2945.26,2455.69 2956.32,2455.69 R11.2@2960.63,2460 2932.38,2488.25
NetR12_2: R12.2 USB.5 USB.7 | length 200.8
  Top Layer w10: 2840,2478.94 2848.79,2470.16 USB.7@2891.95,2470.16
  Top Layer w15: 2840,2478.94 2840,2500 2849.53,2509.53 USB.5@2891.95,2509.53 2892.19,2509.76 2959.76,2509.76 R12.2@2960,2510
NetR18_1: R18.1 U4.19 | length 84.4
  Top Layer w6: R18.1@4099.37,3310 4139,3310 4141.8,3307.2 U4.19@4182.6,3307.2
NetR22_2: R22.2 USB.4 | length 81.3
  Top Layer w6: R22.2@2955.69,2550.69 2955.69,2555 R22.2@2960,2555
  Top Layer w10: USB.4@2891.95,2529.21 2934.21,2529.21 R22.2@2955.69,2550.69
NetR23_2: R23.2 USB.10 | length 70.6
  Top Layer w15: USB.10@2891.95,2411.1 2953.9,2411.1 R23.2@2960,2405
PA0: J2.42 U1.40 WKUP.1 | length 4621.6
  Top Layer w6: v1(2795,2740) 2815,2740 2850,2775 2853.82,2778.82 2879.31,2778.82 2939.05,2778.82 U1.40@2940.3,2780.06 ; v1(4525,2335) 4525,2336.42 WKUP.1@4535,2336.42 WKUP.1@4712.17,2336.42
  Signal w6: v1(2795,2740) 2795,2660 2780,2645 2780,2530 2850,2460 2920,2460 3085.53,2294.47 4484.47,2294.47 v1(4525,2335)
  Bottom Layer w6: v1(4525,2335) 4935,2335 4987,2387 4987,3556 4984,3559 4775,3559 4660,3444 4660,3418 4632.98,3390.98 J2.42@4530.04,3390.98
PA1: J1.3 U1.41 | length 509.6
  Top Layer w6: v2(2875,2750) U1.41@2940.3,2760.37
  Bottom Layer w6: v2(2875,2750) 2872.7,2752.3 2857.7,2752.3 2850,2760 2850,2770 2850,2840 2875,2865 3060,2865 3087.01,2892.01 J1.3@3160,2892.01 J1.3@3157.99,2890
PA2: J1.4 U1.42 | length 590.5
  Top Layer w6: v1(2850,2730) 2885,2730 2895.69,2740.69 U1.42@2940.3,2740.69
  Bottom Layer w6: v1(2850,2730) 2825,2755 2825,2850 2855,2880 3035,2880 3078.5,2923.5 J1.4@3160,2923.5
PA3: J1.44 U1.47 | length 898.2
  Top Layer w6: U1.47@3060.99,2620 3060.49,2620.49 3060.49,2700.49 v1(3065,2705)
  Bottom Layer w6: v1(3065,2705) 3065,2706.97 3153.03,2795 3190,2795 3210,2815 3210,3275.69 3267.26,3332.95 J1.44@3345.04,3332.95
PA4: J1.45 U1.50 | length 853.5
  Top Layer w6: U1.50@3120.04,2620 3115,2625.04 3120,2630.04 3123.68,2633.72 v1(3123.68,2686.32)
  Bottom Layer w6: v1(3123.68,2686.32) 3122.36,2687.64 3122.36,2739.33 3158.03,2775 3200,2775 3230,2805 3230,3270 3261.46,3301.46 J1.45@3345.04,3301.46
PA5: J1.46 U1.51 | length 851.9
  Top Layer w6: U1.51@3139.73,2620 3139.86,2620.14 3139.86,2674.86 ; U1.51@3139.86,2632.41 3139.86,2674.86 ; v1(3139.86,2721) 3141.18,2719.68 3141.18,2676.18 3139.86,2674.86
  Bottom Layer w6: v1(3139.86,2721) 3140,2721.14 3140,2740 3155,2755 3205,2755 3250,2800 3250,3250 3270,3270 J1.46@3345.04,3269.96 J1.46@3345.04,3269.96
PA6: J1.47 U1.52 | length 739.5
  Top Layer w6: U1.52@3159.41,2620 3158.48,2620.93 3158.48,2703.48 v2(3159.71,2704.71)
  Bottom Layer w6: v2@3162,2702.41 v2(3159.71,2704.71) 3160,2705 3160,2706.53 3194.97,2741.5 3208.47,2741.5 3270,2803.03 3270,3218.46 3290,3238.46 J1.47@3345.04,3238.46
PA7: J1.48 U1.53 | length 708.4
  Top Layer w6: U1.53@3179.55,2620 3179.55,2620.45 U1.53@3179.1,2620 3179.32,2620.23 3179.32,2674.32 v2(3179.55,2674.55)
  Signal w6: v2(3179.55,2674.55) 3180,2675 3180,2750 3230,2800 3230,3180 3255,3205 v1(3290,3205)
  Bottom Layer w6: v1(3290,3205) 3290.98,3205.98 3344.06,3205.98 J1.48@3345.04,3206.97
PA8: J2.20 U1.119 | length 623.4
  Top Layer w6: U1.119@3949.39,3291.87 3950.33,3290.94 3990.18,3290.94 4027.5,3328.26 4027.5,3364.5 4010,3382 v1(4010,3385)
  Bottom Layer w6: v1(4010,3385) 3992.5,3367.5 3992.5,3330 4007.5,3315 4105,3315 4210,3420 4270,3420 4342.52,3420 J2.20@4345,3422.48
PA9: J1.51 P2.1 U1.120 | length 3619.2
  Top Layer w6: v1(3805,3310) 3820,3310 3820.78,3310.78 U1.120@3948.61,3310.78 ; v1(3870,3296) 3884.78,3310.78 ; 3884.78,3310.78 U1.120@3948.61,3310.78 ; 3884.78,3310.78 3885.56,3311.56 U1.120@3949.39,3311.56 U1.120@3948.61,3310.78
  Signal w6: v1(3870,3296) 3875.69,3301.69 4223.31,3301.69 4227.5,3297.5 4278.1,3297.5 4285.6,3305 4408.03,3305 4457.94,3255.09 4622.93,3255.09 4623.01,3255 4788,3255 4791.5,3258.5 4975.5,3258.5 4987,3247 4987,2617 4753.53,2383.53 4379.04,2383.53 4333.53,2338.01 4333.53,2329.04 4310.96,2306.47 4279.04,2306.47 4256.47,2329.04 4256.47,2346.83 4226.65,2376.65 P2.1@4195,2345
  some w6: v3(3403.76,3111.24) 3640.99,3111.24 3805,3275.25 v1(3805,3310)
  Bottom Layer w6: J1.51@3345.04,3112.48 3346.28,3111.24 v3(3403.76,3111.24) v3@3405,3110
PA10: J1.52 P2.2 U1.121 | length 3433
  Top Layer w6: v1(3785,3330) 3787.5,3332.5 3867.5,3332.5 3868.76,3331.24 ; v1(3850,3347.5) 3852.5,3347.5 3868.76,3331.24 ; U1.121@3949.39,3331.24 3901.95,3331.24 3900.71,3330 3882.75,3330 3881.51,3331.24 3868.76,3331.24
  some w6: v1(3440,3055) 3640,3055 3850,3265 v1(3850,3347.5) ; v1(3785,3330) 3787.5,3332.5 3817.25,3332.5 3827.5,3322.25 3827.5,3252.5 3645,3070 3216,3070 3184.72,3038.72 3184.72,2701.28 3262,2624 3262,2532 3450,2344 4071,2344 4125,2290 4260,2290 4285,2315 4285,2335 P2.2@4295,2345
  Bottom Layer w6: J1.52@3345.04,3080.98 3414.02,3080.98 v1(3440,3055)
PA11: J1.53 R12.1 U1.122 | length 2134.8
  Top Layer w6: R12.1@2999.37,2510 v1(3040,2510) ; v1(3890,3347.5) 3892.96,3350.46 3948.93,3350.46 U1.122@3949.39,3350.93
  Signal w6: v1(3040,2510) 3066,2536 3095,2565 3095,2763 3162,2830 3162,3220 3198,3256 3355,3256 v1(3406,3205)
  some w6: v3(3400,3045) 3401.91,3043.09 3416.91,3043.09 3435,3025 3650,3025 3890,3265 v1(3890,3347.5)
  Bottom Layer w6: J1.53@3345.04,3049.49 3347.61,3046.91 3398.09,3046.91 v3(3400,3045) 3401.91,3043.09 3416.4,3043.09 3425.49,3034 3455,3034 3461,3040 3461,3115 3430.8,3145.2 3430.75,3145.25 3430.75,3180.25 v1(3406,3205)
PA12: J1.54 R11.1 U1.123 | length 1841.7
  Top Layer w6: R11.1@3000,2460 v1(3040,2460) ; v1(3410,3017.99) 3437.01,3017.99 3448,3007 v1(3448,2950) ; U1.123@3949.39,3370.61 3989.39,3370.61 4010,3350 v1(4010,3347.5)
  Signal w6: v1(3040,2460) 3095,2515 3330.25,2515 3392.5,2577.25 3392.5,2712.04 3382.5,2722.04 3382.5,2853.5 3448,2919 v1(3448,2950)
  some w6: v1(3410,3017.99) 3422.99,3005 3690,3005 4010,3325 v1(4010,3347.5)
  Bottom Layer w6: J1.54@3345.04,3017.99 v1(3410,3017.99)
PA15: J1.41 U1.138 | length 780.8
  Top Layer w6: v1(3750,3310) 3767.5,3327.5 3767.5,3626.95 U1.138@3769.65,3629.09
  Bottom Layer w6: J1.41@3345.04,3427.44 3372.6,3427.44 3393.55,3406.49 3396.04,3404 3426,3404 3507.5,3322.5 3677.5,3322.5 3690,3310 v1(3750,3310)
PB0: J1.56 U1.56 | length 527
  Top Layer w6: v2(3230,2685) 3239.08,2675.92 U1.56@3239.08,2620.93 ; U1.56@3238.15,2620 U1.56@3239.08,2620.93 ; U1.56@3239.08,2620 U1.56@3239.08,2620.93
  Signal w6: v2(3230,2685) 3270,2725 3270,2930 3295,2955 v1(3400,2955)
  Bottom Layer w6: J1.56@3345.04,2955 v1(3400,2955)
PB2: J1.55 U1.58 U6.6 | length 2697.7
  Top Layer w6: v1(2830,3911) U6.6@2830,3946.5 ; U1.58@3278.76,2618.76 U1.58@3277.52,2620 3277.52,2570.48 v1(3297,2551)
  Signal w6: v1(3155,2550) 3296,2550 v1(3297,2551)
  some w6: v1(2830,3911) 2754,3835 2754,3287 2780,3261 2780,3200 2755,3175 2755,2648 2873,2530 3065,2530 3085.5,2550.5 3095,2560 3129,2560 3139,2550 v1(3155,2550) ; v1(3297,2551) 3280,2568 3280,2720 3285,2725 3285,2940 3320,2975 3355,2975 3365,2985 v1(3410,2985)
  Bottom Layer w6: 3397,2985 3395.5,2986.5 J1.55@3345.04,2986.5 3345.79,2985.75 3409.25,2985.75 v1(3410,2985)
PB3: J1.21 U1.161 | length 296
  Top Layer w6: v1(3290,3540) 3316.89,3566.89 U1.161@3316.89,3629.09
  Bottom Layer w6: J1.21@3160,3458.94 3263.94,3458.94 3290,3485 v1(3290,3540)
PB4: J1.22 U1.162 | length 237.3
  Top Layer w6: v1(3265,3525.5) 3274.16,3548.91 3297.21,3573.06 U1.162@3297.21,3629.09
  Bottom Layer w6: J1.22@3160,3490.43 3235.43,3490.43 3265,3520 v1(3265,3525.5)
PB6: J1.24 U1.164 U6.1 | length 941.3
  Top Layer w6: U6.1@2730,3633.5 2730,3606 2761,3575 2879.74,3575 2909.86,3605.12 2909.86,3609.86 2999.67,3699.67 2997.92,3699.67 2993.25,3695 v2(2990,3695) ; v2(3215,3545) 3240,3570 3245,3570 3258.92,3583.92 3258.92,3628.01 U1.164@3257.84,3629.09 3257.84,3670 3255.84,3672 3255.84,3689.16 v2(3255,3690)
  some w6: v2(2990,3695) 2990,3660 3000,3650 3135,3650 3160,3675 3190,3675 3205,3660 3235,3660 3243.85,3668.85 3243.85,3675.69 3255,3686.84 v2(3255,3690)
  Bottom Layer w6: J1.24@3160,3553.43 3203.33,3553.43 3211.75,3545 v2(3215,3545)